# Altium PCB TEENSY 1.PcbDoc
Units mil, origin at the board's own origin, x right, y up, seen from the top; angles counter-clockwise.
Board outline 3900 x 3800 mil, 2 copper layers (Top Layer, Bottom Layer); 8 components, 15 nets, 109 pads, 0 vias.
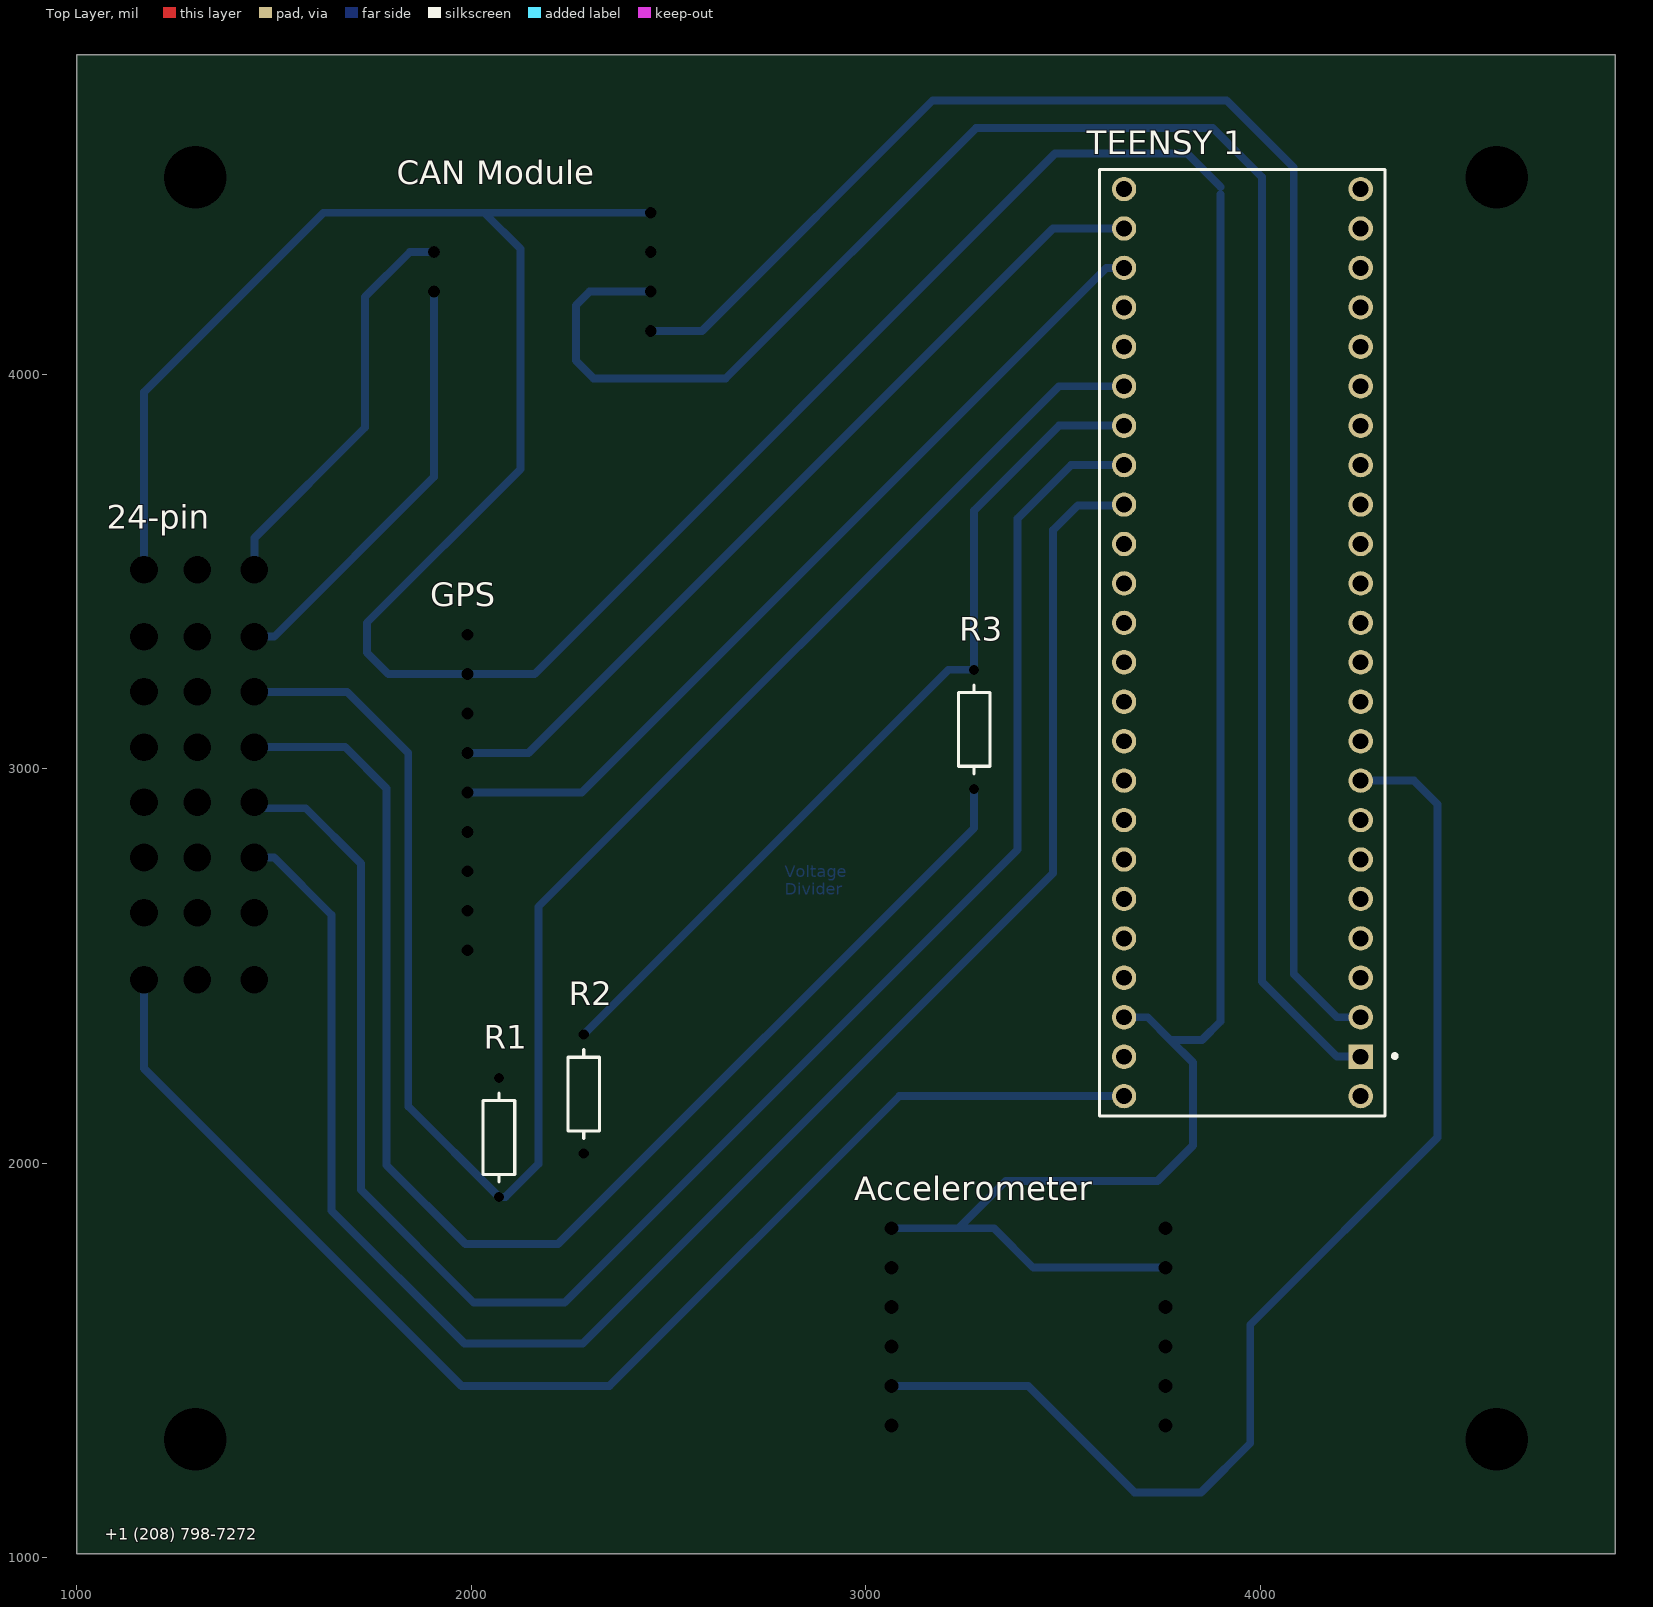
[diagram p0: Top Layer view]
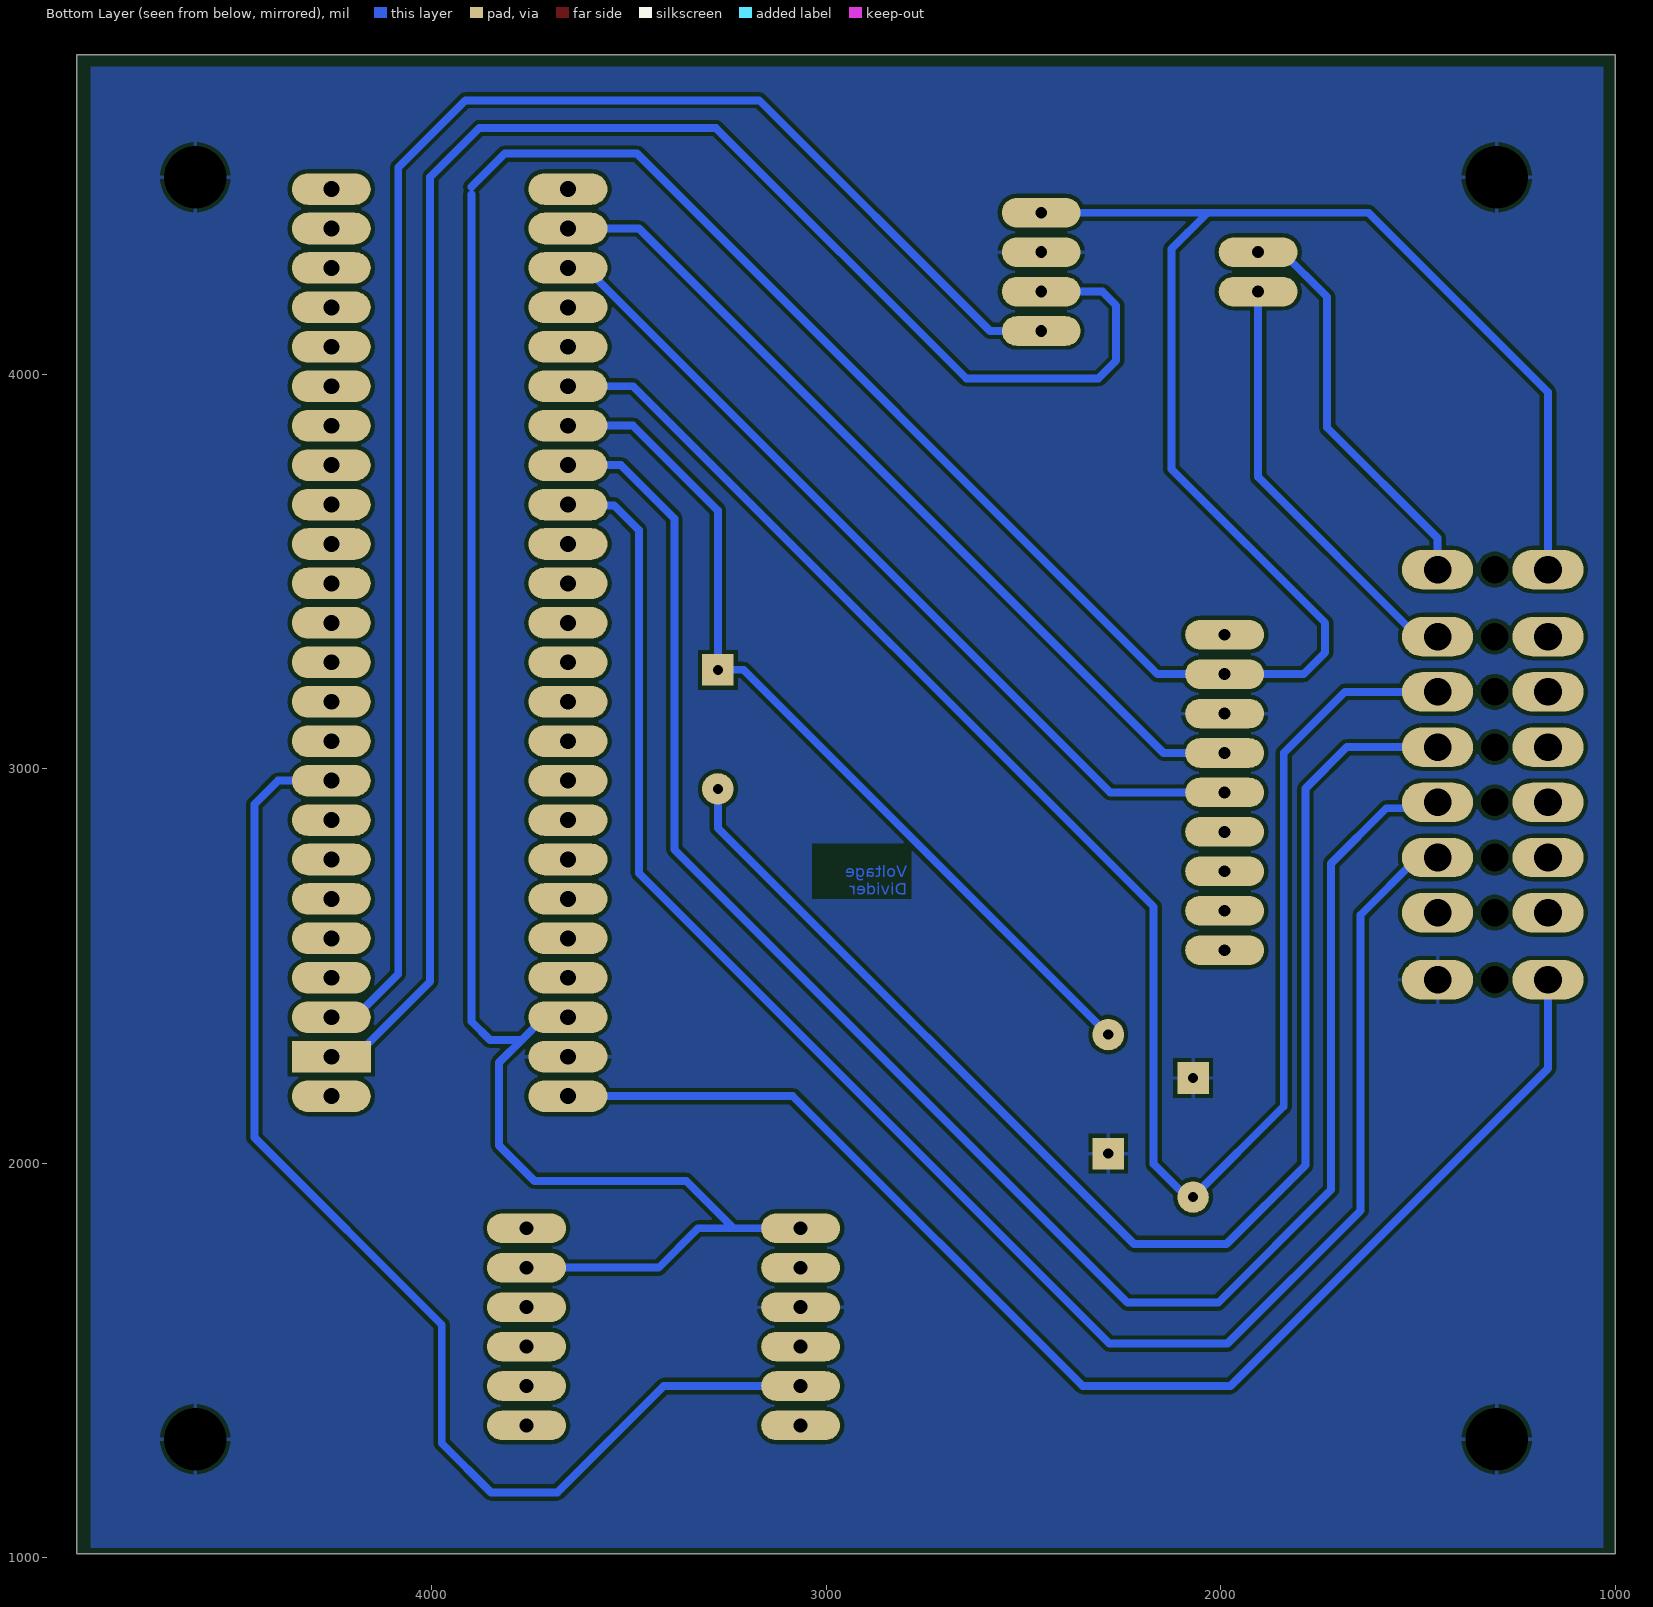
[diagram p1: Bottom Layer view, seen from below]
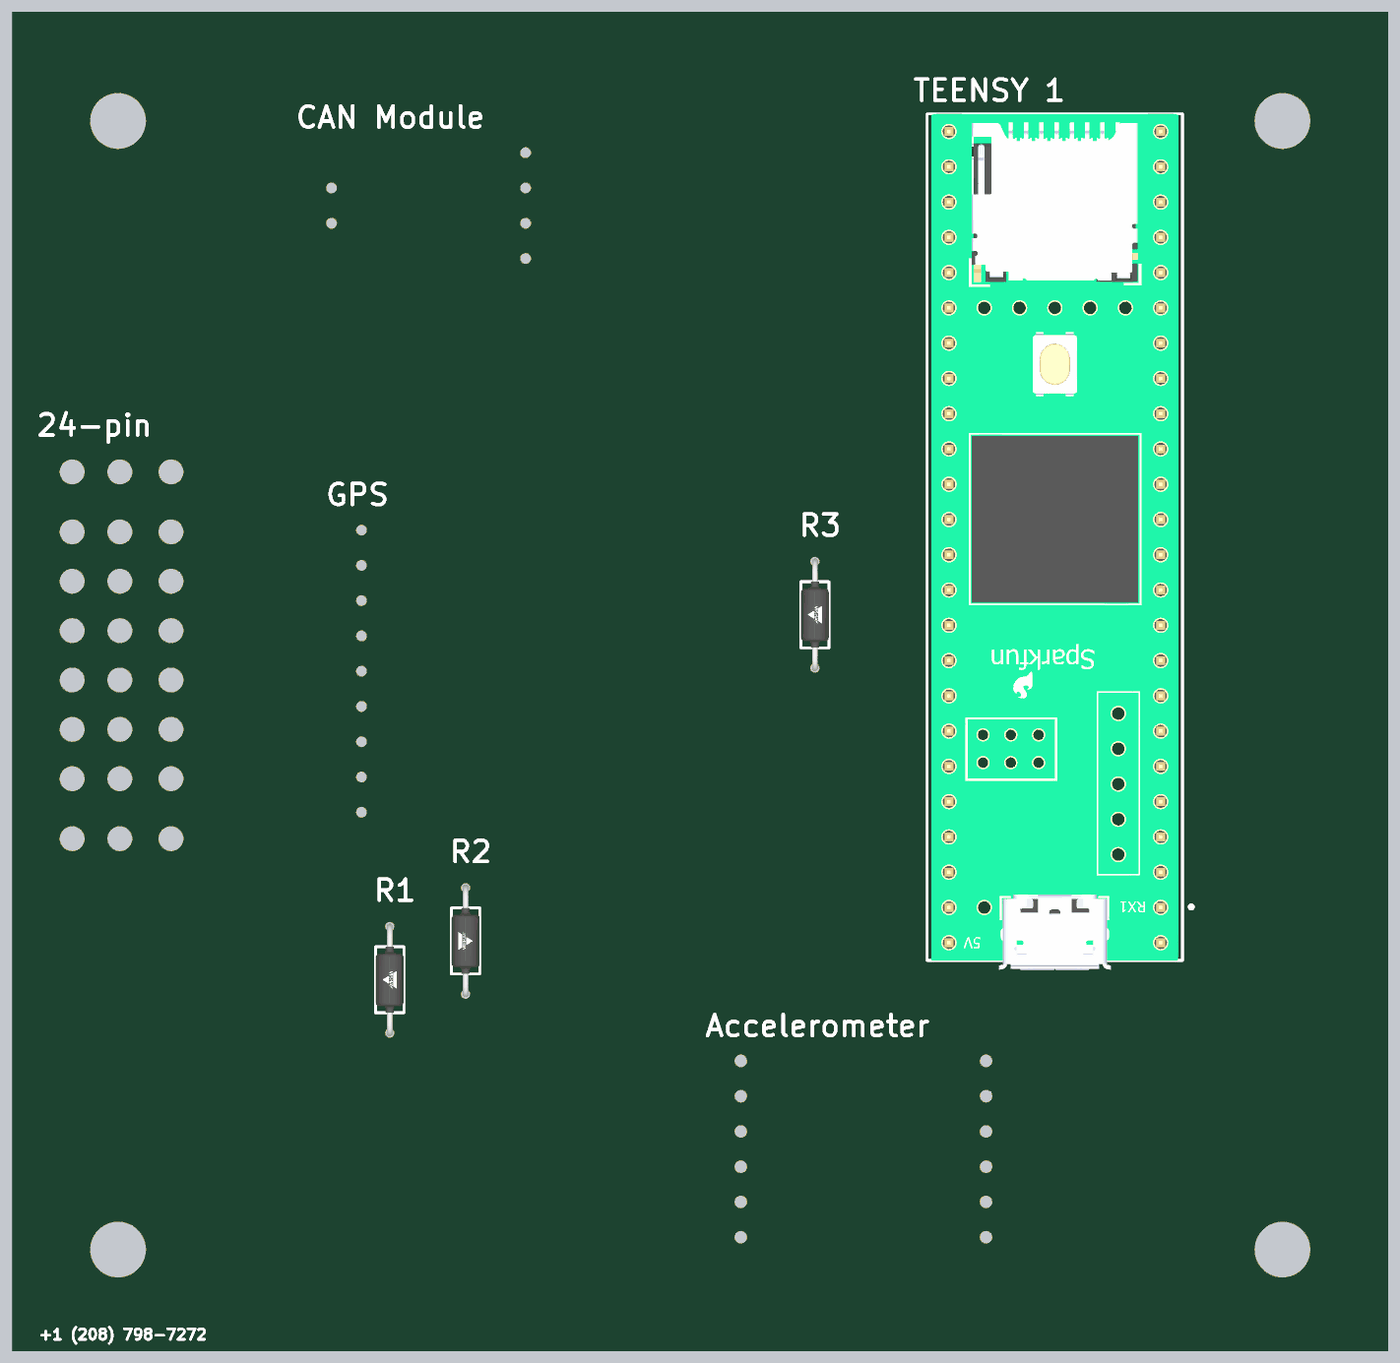
[diagram p2: 3D render of the assembled board from above, using the file's embedded part models]

## Layer stack, top to bottom
Top Solder: solder mask 0.4, Solder Resist, Dk 3.5
Top Layer: signal copper 1.4
Dielectric 1: dielectric 12.6, FR-4, Dk 4.8
Bottom Layer: signal copper 1.4
Bottom Solder: solder mask 0.4, Solder Resist, Dk 3.5

## Board outline
1000,4810 4900,4810 4900,1010 1000,1010

## Design rules (kind name [scope] priority, off if disabled: settings)
Clearance [All] p1: gap=10 ignorepadtopadclearanceinfootprint=FALSE
PolygonConnect [All] p1: connectstyle=Relief reliefconductorwidth=10 reliefentries=4 polygonreliefangle="90 Angle" airgapwidth=10
RoutingVias [All] p1: holewidth=28 width=50 viastyle="Through Hole" minholewidth=28 minwidth=50 maxholewidth=28 maxwidth=50
SolderMaskExpansion [All] p1: expansion=4 istentingtop=FALSE
Width [All] p1: maxlimit=50 minlimit=20 preferedwidth=20 minimp=50.000000 maximp=50.000000 favimp=50.000000
30 further rules are at their usual default settings.

## Components (designator, comment, footprint, x,y, rotation, side; value= is the part's Value field where it differs from the comment)
24-pin "DJ7242" DJ7242-Footprint-1 1095,3505 r270 top
Accelerometer "Accelerometer Header" "Accelerometer Header-Footprint-1" 2970,1835 r270 top
"CAN Module" "CAN Module" "CAN Module-Footprint-1" 2455,4410 r180 top
GPS "GPS" GPS-Footprint-1 2135,2495 r90 top
R1 "CMF5073K200FHEB" FP-CMF50-0 2070,2065 r270 top
R2 "CMF5073K200FHEB" FP-CMF50-0 2285,2175 r90 top
R3 "CMF5073K200FHEB" FP-CMF50-0 3275,3100 r270 top
"TEENSY 1" "TEENSY 4.1" FP-DEV-16996-MFG 3955,3320 r90 top

## Footprints (in the part's own frame and the unit in brackets; to place one, negate y for a bottom-side part, rotate by r counter-clockwise, add the part's x,y. Pads: shape width x height; smd on the part's side, far side on the other; paste and mask are expansions set on the pad)
"Accelerometer Header-Footprint-1" [mil]
  round 0 / inner round 60 / far side oval 75x200 hole 35: 1(0,95) 2(100,95) 3(200,95) 4(300,95) 5(400,95) 6(500,95) 7(0,790) 8(100,790) 9(200,790) 10(300,790) 11(400,790) 12(500,790)
"CAN Module-Footprint-1" [mil]
  round 0 / inner round 60 / far side oval 200x75 hole 30: 1(0,300) 2(0,200) 3(0,100) 4(0,0) 5(550,200) 6(550,100)
DJ7242-Footprint-1 [mil]
  round 0 / inner round 60 / far side oval 100x180 hole 70: 1(0,355) 2(170,355) 3(310,355) 4(450,355) 5(590,355) 6(730,355) 7(870,355) 8(1040,355) 17(0,75) 18(170,75) 19(310,75) 20(450,75) 21(590,75) 22(730,75) 23(870,75) 24(1040,75)
  round 0 hole 70: 9(0,210) 10(170,210) 11(310,210) 12(450,210)
  round 0 / inner oval 100x200 / far side round 0 hole 70: 13(590,210) 14(730,210) 15(870,210) 16(1040,210)
FP-CMF50-0 [mm]
  rect 0x0 / inner rect 1.15x1.15 / far side rect 2.032x2.032 hole 0.65 paste-2539.97 mask+0.102: 1(-3.835,0)
  round 0 / inner round 1.15 / far side round 2.032 hole 0.65 paste-2539.97 mask+0.102: 2(3.835,0)
  silkscreen extent -2.86,-1.01 2.86,1.01, body extent -4.51,-1.11 4.51,1.11, height 0.25
FP-DEV-16996-MFG [mm]
  rect 1.57x1.57 / inner rect 1.57x1.57 / far side rect 2.032x5.08 hole 1.02 paste-2539.97 mask+0.102: 0(-26.67,-7.62)
  round 1.57 / inner round 1.57 / far side oval 2.032x5.08 hole 1.02 paste-2539.97 mask+0.102: 1(-24.13,-7.62) 2(-21.59,-7.62) 3(-19.05,-7.62) 4(-16.51,-7.62) 5(-13.97,-7.62) 6(-11.43,-7.62) 7(-8.89,-7.62) 8(-6.35,-7.62) 9(-3.81,-7.62) 10(-1.27,-7.62) 11(1.27,-7.62) 12(3.81,-7.62) 13(3.81,7.62) 14(1.27,7.62) 15(-1.27,7.62) 16(-3.81,7.62) 17(-6.35,7.62) 18(-8.89,7.62) 19(-11.43,7.62) 20(-13.97,7.62) 21(-16.51,7.62) 22(-19.05,7.62) 23(-21.59,7.62) 24(8.89,-7.62) 25(11.43,-7.62) 26(13.97,-7.62) 27(16.51,-7.62) 28(19.05,-7.62) 29(21.59,-7.62) 30(24.13,-7.62) 31(26.67,-7.62) 32(29.21,-7.62) 33(29.21,7.62) 34(26.67,7.62) 35(24.13,7.62) 36(21.59,7.62) 37(19.05,7.62) 38(16.51,7.62) 39(13.97,7.62) 40(11.43,7.62) 41(8.89,7.62) 42(-29.21,7.62) 43(-26.67,7.62) 44(-24.13,7.62) 45(6.35,7.62) 46(-29.21,-7.62) 47(6.35,-7.62)
  silkscreen extent -30.48,-9.95 30.48,9.19, body extent -30.58,-9.29 30.58,9.29, height 0.25
GPS-Footprint-1 [mil]
  round 0 / inner round 60 / far side oval 75x200 hole 30: 1(45,145) 2(145,145) 3(245,145) 4(345,145) 5(445,145) 6(545,145) 7(645,145) 8(745,145) 9(845,145)

## Part data
24-pin: library part CMP-00030-00002-5, "24-pin connector"
Accelerometer: library part CMP-002-00071-3, "Header for Adafruit Accelerometer"
"CAN Module": library part CMP-00030-00003-1, "CAN waveshare"
GPS: library part CMP-002-00072-2, "Adafruit GPS chip"
R1 R2 R3: library part CMP-00030-44386654-1, "CMF5073K200FHEB Res Metal Film 73.2K Ohm 1% 0.125W(1/8W) ±50ppm/°C Epoxy AXL T/R", Case/Package=Axial, Max Operating Temperature=175°C, Max Power Dissipation=250mW, Min Operating Temperature=-55°C, Power Rating=125mW, Resistance=73.2kΩ, Temperature Coefficient=50ppm/°C, Tolerance=1%, Voltage Rating=200V, Composition="Metal Film", Diameter=1.65mm, Features="Flame Retardant Coating, Moisture Resistant", Lead Free="Lead Free", Length=3.81mm, Mount="Through Hole", NexarPartId=44386654, Number of Terminations=2, Packaging="Cut Tape", RoHS=Compliant, Schedule B="8533210090, 8533210090", Termination=Axial, Voltage Rating (DC)=200V, Width=1.65mm
"TEENSY 1": library part CMP-157412-000001-1, "TEENSY 4.1 (HEADERS)"

## Free pads (board coordinates)
  round 40 / inner round 60 / far side round 40 hole 157.48: 6(4600,4500) 7(4600,1300) 8(1300,1300) 9(1300,4500)

## Nets (pads, with @x,y where several pads share a name; then routed paths per layer and width w, separated by ;. In a path a pad name is that pad's centre, name@x,y a point inside that pad or via, vN(x,y) a via of type N, cw(c..) or ccw(c..) an arc to the next point about the centre after c; other vN are vias at no path point)
3.3V: 24-pin.17 "CAN Module.4" "TEENSY 1.44" Accelerometer.1 Accelerometer.8 GPS.8 | length 10103.4
  Bottom Layer w20: 24-pin.17 1170,3955 1625,4410 2032.79,4410 ; 2455,4410 2032.79,4410 ; Accelerometer.1 3235,1835 ; 3655,2370 3715,2370 3772.5,2312.5 ; Accelerometer.8 3425,1735 3325,1835 3235,1835 ; 3900,4456.95 3900,2359.61 3852.89,2312.5 3772.5,2312.5 ; 3900,4475 3815,4560 3480,4560 2160,3240 2052.5,3240 GPS.8 1790,3240 1735,3295 1735,3370 2125,3760 2125,4317.79 2032.79,4410 ; 3235,1835 3355,1955 3740,1955 3830,2045 3830,2255 3772.5,2312.5
"AX RX": "TEENSY 1.7" Accelerometer.5 | length 3110.2
  Bottom Layer w20: Accelerometer.5 3412,1435 3682,1165 3850,1165 3975,1290 3975,1590 4450,2065 4450,2910 4390,2970 4255,2970
"BLPS RD": "TEENSY 1.39" R2.2 R3.1 | length 2246.2
  Bottom Layer w20: R2.2 3210,3250.98 R3.1 3275,3655 3490,3870 3655,3870
"CAN RX": "CAN Module.2" "TEENSY 1.0" | length 4786.6
  Bottom Layer w20: 2455,4210 2300,4210 2265,4175 2265,4035 2310,3990 2645,3990 3280,4625 3880,4625 4004.42,4500.58 4004.42,2460.58 4195,2270 4255,2270
"CAN TX": "CAN Module.1" "TEENSY 1.1" | length 4203.3
  Bottom Layer w20: 2455,4110 2585,4110 3170,4695 3915,4695 4085.39,4524.61 4085.39,2479.61 4195,2370 4255,2370
CANH: 24-pin.2 "CAN Module.5" | length 1092.8
  Bottom Layer w20: 24-pin.2 1500,3335 1905,3740 1905,4210
CANL: 24-pin.1 "CAN Module.6" | length 1029.3
  Bottom Layer w20: 24-pin.1 1450,3585 1730,3865 1730,4196.12 1843.88,4310 1905,4310
"COOL RD": 24-pin.3 "TEENSY 1.38" R1.2 | length 4494.1
  Bottom Layer w20: 24-pin.3 1685,3195 1840,3040 1840,2144.02 R1.2 2086.24,1914.02 2169.92,1997.7 2169.92,2649.92 3490,3970 3655,3970
"DAMP POT 1": 24-pin.5 "TEENSY 1.40" | length 4586.6
  Bottom Layer w20: 24-pin.5 1465,2900 1580,2900 1720,2760 1720,1932.48 2006.24,1646.24 2236.24,1646.24 3385,2795 3385,3634.26 3520.74,3770 3655,3770
"DAMP POT 2": 24-pin.6 "TEENSY 1.41" | length 4545.7
  Bottom Layer w20: 24-pin.6 1500,2775 1645,2630 1645,1880 1982.44,1542.56 2282.56,1542.56 3475,2735 3475,3605 3538,3668 3653,3668 3655,3670
GND: 24-pin.8 "CAN Module.3" "TEENSY 1.43" Accelerometer.3 GPS.7 pad.6 pad.7 pad.8 pad.9 R1.1 R2.1
"GPS RX": "TEENSY 1.34" GPS.6 | length 2215.9
  Bottom Layer w20: GPS.6 2145,3040 3475,4370 3655,4370
"GPS TX": "TEENSY 1.35" GPS.5 | length 2215.9
  Bottom Layer w20: GPS.5 2280,2940 3610,4270 3655,4270
Net24-pin_4: 24-pin.4 R3.2 | length 3442.3
  Bottom Layer w20: 24-pin.4 1680,3055 1785,2950 1785,1995 1985,1795 2220,1795 3275,2850 R3.2
VIN: 24-pin.24 "TEENSY 1.42" | length 3347.9
  Bottom Layer w20: 24-pin.24 1170,2240 1975,1435 2350,1435 3085,2170 3655,2170
pads on no net: 24-pin.7 24-pin.9 24-pin.10 24-pin.11 24-pin.12 24-pin.13 24-pin.14 24-pin.15 24-pin.16 24-pin.18 24-pin.19 24-pin.20 24-pin.21 24-pin.22 24-pin.23 "TEENSY 1.2" "TEENSY 1.3" "TEENSY 1.4" "TEENSY 1.5" "TEENSY 1.6" "TEENSY 1.8" "TEENSY 1.9" "TEENSY 1.10" "TEENSY 1.11" "TEENSY 1.12" "TEENSY 1.13" "TEENSY 1.14" "TEENSY 1.15" "TEENSY 1.16" "TEENSY 1.17" "TEENSY 1.18" "TEENSY 1.19" "TEENSY 1.20" "TEENSY 1.21" "TEENSY 1.22" "TEENSY 1.23" "TEENSY 1.24" "TEENSY 1.25" "TEENSY 1.26" "TEENSY 1.27" "TEENSY 1.28" "TEENSY 1.29" "TEENSY 1.30" "TEENSY 1.31" "TEENSY 1.32" "TEENSY 1.33" "TEENSY 1.36" "TEENSY 1.37" "TEENSY 1.45" "TEENSY 1.46" "TEENSY 1.47" Accelerometer.2 Accelerometer.4 Accelerometer.6 Accelerometer.7 Accelerometer.9 Accelerometer.10 Accelerometer.11 Accelerometer.12 GPS.1 GPS.2 GPS.3 GPS.4 GPS.9

## Polygon pours and split planes (outlines as drawn)
GND on Bottom Layer "GND_L02_P000" (solid, pour order 0): 4865,4780 4865,1025 1030,1025 1030,4780

## Other copper
Bottom Layer:
  text "Voltage / Divider" at 2795,2680 h30

## Silkscreen, mask and mechanical layers (free items; w line width, h text height)
Top Overlay:
  text "+1 (208) 798-7272" at 1070,1045 h30